# Altium PCB ModeloLevitadorMagneticoV1.0.PcbDoc
Units mm, origin at the board's own origin, x right, y up, seen from the top; angles counter-clockwise.
Board outline 200 x 150 mm, 2 copper layers (Top Layer, Bottom Layer); 203 components, 112 nets, 556 pads, 0 vias.
Unrouted connection lines stored in the file: 412.
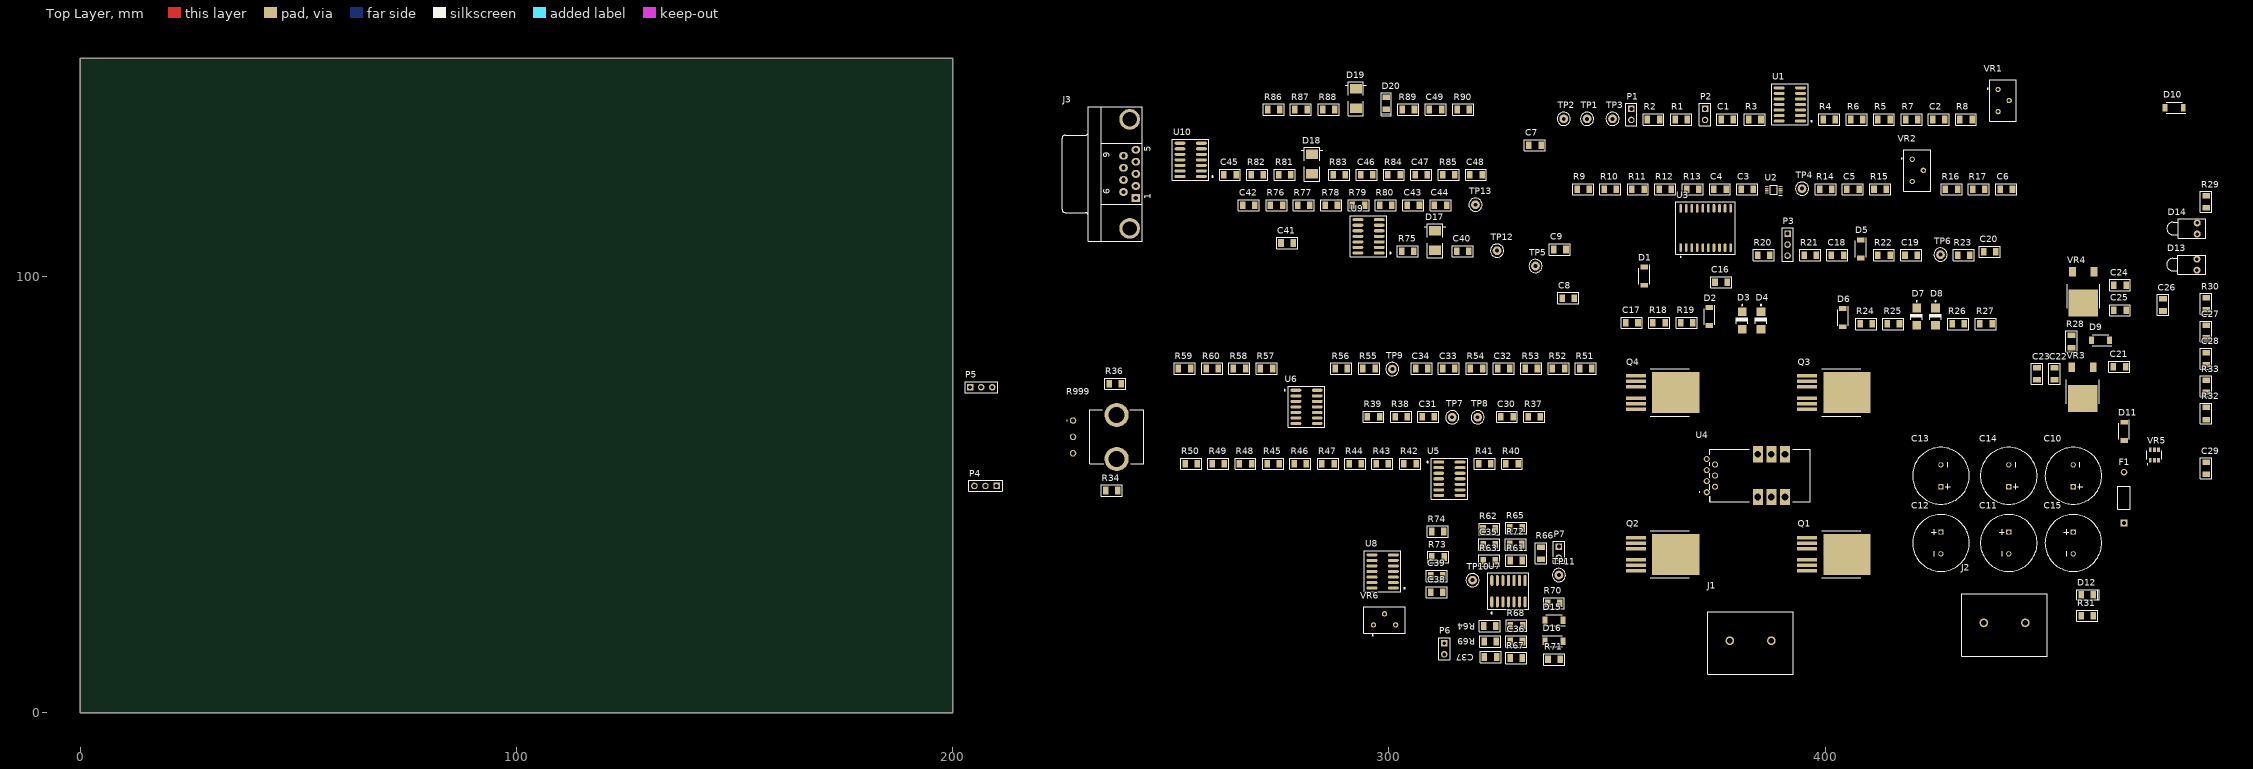
[diagram p0: Top Layer view]
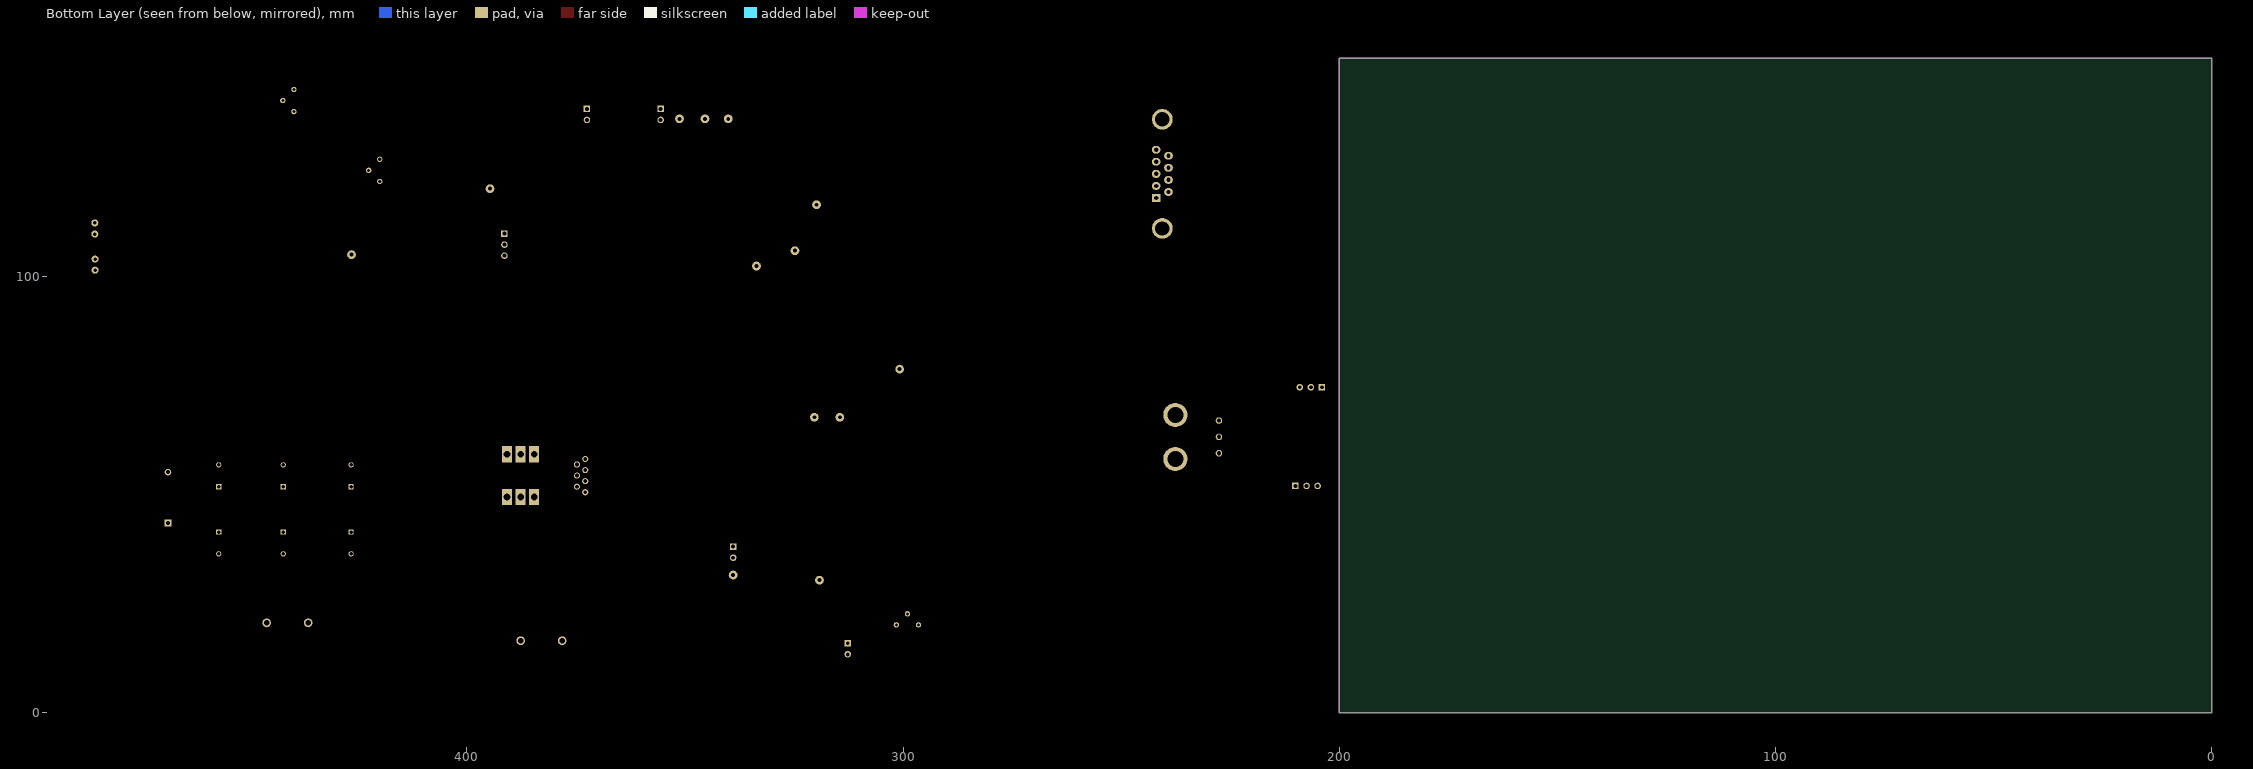
[diagram p1: Bottom Layer view, seen from below]

## Layer stack, top to bottom
Top Solder: solder mask 0.0102, Solder Resist, Dk 3.5
Top Layer: signal copper 0.0356
Dielectric 1: dielectric 0.32, FR-4, Dk 4.8
Bottom Layer: signal copper 0.0356
Bottom Solder: solder mask 0.0102, Solder Resist, Dk 3.5

## Board outline
0,0 200,0 200,150 0,150

## Design rules (kind name [scope] priority, off if disabled: settings)
AcuteAngle [All] p1: minimum=6.00000000000000E+0001 checktracksonly=TRUE
AssemblyTestPointUsage [(not InNetClass('NOTESTPOINTS'))] p1: allowmultiple=TRUE
AssemblyTestPointUsage AssemblyTestPointUsageN [InNetClass('NOTESTPOINTS')] p2: valid=2 allowmultiple=TRUE
AssemblyTestpoint [All] p1: testpointundercomponent=TRUE minsize=0.8 maxsize=2 preferedsize=1 minholesize=0 maxholesize=0.35 preferedholesize=0 testpointgrid=1.27 usegrid=FALSE gridoriginx=87.5 gridoriginy=62.5 gridtolerance=0 allowsidetop=TRUE minspacing=2.54 // Zollner
BoardOutlineClearance BoardCopperOutlineClearance [(OnLayer('Top Layer') OR OnLayer('Bottom Layer') )] p1: gap=0.5 ignorepadtopadclearanceinfootprint=FALSE except(1: Poly-OutlineEdge Region-OutlineEdge; 1.5: SMDPad-OutlineEdge THPad-OutlineEdge)
Clearance PadToViaClearance [IsVia and not IsComponentVia vs IsPad] p1: gap=0.025 ignorepadtopadclearanceinfootprint=TRUE
Clearance "Clearance (FAB)" [All] p2: gap=0.203 ignorepadtopadclearanceinfootprint=TRUE except(0.305: Arc-Poly Track-Poly SMDPad-Poly THPad-Poly Via-Poly Fill-Poly Poly-Poly)
ComponentClearance ComponentClearance_NetTie [((ObjectKind = 'Component') And (ComponentType = 'Net Tie')) Or (Footprint = 'StarPoint') Or (Footprint like 'NetTieVia*')] p1: gap=-3.81 collisioncheckmode=3 verticalgap=-3.81 showdistances=FALSE
ComponentClearance [All] p2: gap=0.254 collisioncheckmode=3 verticalgap=0.254 showdistances=FALSE
DiffPairsRouting [All] p1: maxlimit=1.27 minlimit=0.203 mostfreqgap=0.203 toplayer_minwidth=0.152 toplayer_maxwidth=2.54 toplayer_prefwidth=0.254 bottomlayer_minwidth=0.152 bottomlayer_maxwidth=2.54 bottomlayer_prefwidth=0.254 maxuncoupledlength=12.7
FabricationTestPointUsage [All] p1: valid=2 allowmultiple=FALSE
FabricationTestpoint [All] p1: side=3 testpointundercomponent=TRUE minsize=1.016 maxsize=2.54 preferedsize=1.524 minholesize=0 maxholesize=1.016 preferedholesize=0.813 testpointgrid=0.025 allowsidetop=TRUE allowsidebottom=TRUE usegrid=FALSE gridtolerance=0
HoleSize [All] p1: absolutevalues=TRUE maxlimit=6.35 minlimit=0.3 maxpercent=80.000 minpercent=20.000 // Zollner
HoleToHoleClearance HoleToHoleClearance_NetTieVia [InPadClass('NetTieVias') vs InPadClass('NetTieVias')] p1: gap=0 allowstackedmicrovias=TRUE
HoleToHoleClearance [All] p2: gap=0.25 allowstackedmicrovias=TRUE // Zollner
MinimumAnnularRing [All] p1: minimumring=0.15 // PCBWAY
MinimumSolderMaskSliver [All] p1: minsoldermaskwidth=0.2 // Zollner
PlaneClearance PlaneClearance_1 [All] p1: clearance=0.508
PlaneConnect [All] p1: pad.planeconnectstyle=Relief pad.reliefexpansion=0.508 pad.reliefentries=4 pad.reliefconductorwidth=0.254 pad.reliefairgap=0.254 via.planeconnectstyle=Direct via.reliefexpansion=0.508 via.reliefentries=4 via.reliefconductorwidth=0.254 via.reliefairgap=0.254
PolygonConnect [All] p1: thpad.connectstyle=Relief thpad.reliefconductorwidth=0.254 thpad.reliefentries=4 thpad.polygonreliefangle="90 Angle" thpad.airgapwidth=0.254 smdpad.connectstyle=Relief smdpad.reliefconductorwidth=0.254 smdpad.reliefentries=4 smdpad.polygonreliefangle="90 Angle" smdpad.airgapwidth=0.254 via.connectstyle=Direct via.reliefconductorwidth=0.254 via.reliefentries=4 via.polygonreliefangle="90 Angle" via.airgapwidth=0.254
RoutingVias [All] p1: holewidth=0.35 width=0.7 viastyle="Through Hole" minholewidth=0.3 minwidth=0.6 maxholewidth=1.27 maxwidth=1.27
SMDEntry [not IsTestpoint] p1: side=TRUE corner=TRUE anyangle=FALSE
SMDNeckDown [not IsTestpoint] p1: percent=90.000
SMDToCorner [All] p1: distance=10000
SMDToPlane [All] p1: distance=0
ShortCircuit [All vs not IsBoardCutoutRegion] p1: allowed=FALSE
SilkToSolderMaskClearance [IsPad] p1: minsilkscreentomaskgap=0.127 clearancetoexposedcopper=TRUE
SolderMaskExpansion [All] p1: expansion=0.05 istentingtop=FALSE // Zollner
SolderMaskExpansion SolderMaskExpansionToHoles [All] p2: expansion=0.1 istentingtop=FALSE soldermaskfromhole=TRUE // Zollner
UnRoutedNet [All] p1: checkbadconnections=TRUE
Width [All] p1: maxlimit=12.7 minlimit=0.203 preferedwidth=0.254
16 further rules are at their usual default settings.

## Classes and differential pairs
component class U_Signals2uC: C40 C41 C42 C43 C44 C45 C46 C47 C48 C49 D17 D18 D19 D20 J3 R75 R76 R77 R78 R79 R80 R81 R82 R83 R84 R85 R86 R87 R88 R89 R90 TP12 TP13 U9 U10
component class U_Fuentes: C21 C22 C23 C24 C25 C26 C27 C28 C29 D9 D10 D11 D12 D13 D14 F1 J2 R28 R29 R30 R31 R32 R33 VR3 VR4 VR5
component class U_Estimador: C35 C36 C37 C38 C39 D15 D16 P6 P7 R61 R62 R63 R64 R65 R66 R67 R68 R69 R70 R71 R72 R73 R74 TP10 TP11 U7 U8 VR6
component class "U_Controlador de corriente  V3": C1 C2 C3 C4 C5 C6 C7 C8 C9 C10 C11 C12 C13 C14 C15 C16 C17 C18 C19 C20 D1 D2 D3 D4 D5 D6 D7 D8 J1 P1 P2 P3 Q1 Q2 Q3 Q4 R1 R2 R3 R4 R5 R6 R7 R8 R9 R10 R11 R12 R13 R14 R15 R16 R17 R18 R19 R20 R21 R22 R23 R24 R25 R26 R27 TP1 TP2 TP3 TP4 TP5 TP6 U1 U2 U3 U4 VR1 VR2
component class U_Compensador: C30 C31 C32 C33 C34 R37 R38 R39 R40 R41 R42 R43 R44 R45 R46 R47 R48 R49 R50 R51 R52 R53 R54 R55 R56 R57 R58 R59 R60 TP7 TP8 TP9 U5 U6
component class Principal: P4 P5 R34 R36 R999

## Components (designator, comment, footprint, x,y, rotation, side; value= is the part's Value field where it differs from the comment)
C1 "Capacitor" C1206 377.557,135.966 r180 top
C2 "Capacitor" C1206 426.071,135.966 r180 top
C3 "Capacitor" C1206 382.129,119.964 r180 top
C4 "Capacitor" C1206 375.906,119.964 r180 top
C5 "Capacitor" C1206 406.386,119.964 r180 top
C6 "Capacitor" C1206 441.565,119.964 r180 top
C7 "Capacitor" C1206 333.485,130.04 r0 top
C8 "Capacitor" C1206 341.111,94.988 r0 top
C9 "Capacitor" C1206 339.203,106.164 r0 top
C10 "EKY-350ELL102MK25S" CAPPRD500W60D1300H2650 456.9,51.773 r90 top
C11 "EKY-350ELL102MK25S" CAPPRD500W60D1300H2650 442.1,41.373 r270 top
C12 "EKY-350ELL102MK25S" CAPPRD500W60D1300H2650 426.55,41.373 r270 top
C13 "EKY-350ELL102MK25S" CAPPRD500W60D1300H2650 426.55,51.773 r90 top
C14 "EKY-350ELL102MK25S" CAPPRD500W60D1300H2650 442.1,51.773 r90 top
C15 "EKY-350ELL102MK25S" CAPPRD500W60D1300H2650 456.9,41.373 r270 top
C16 "Capacitor" C1206 376.16,98.628 r180 top
C17 "Capacitor" C1206 355.713,89.357 r180 top
C18 "Capacitor" C1206 402.83,104.851 r180 top
C19 "Capacitor" C1206 419.721,104.851 r180 top
C20 "Capacitor" C1206 437.755,105.613 r180 top
C21 "Capacitor" C1206 467.475,79.273 r180 top
C22 "Capacitor" C1206 452.575,77.648 r90 top
C23 "Capacitor" C1206 448.6,77.673 r90 top
C24 "Capacitor" C1206 467.6,97.973 r180 top
C25 "Capacitor" C1206 467.6,92.223 r180 top
C26 "Capacitor" C1206 477.444,93.442 r90 top
C27 "Capacitor" C1206 487.35,87.346 r90 top
C28 "Capacitor" C1206 487.35,81.123 r90 top
C29 "Capacitor" C1206 487.35,55.977 r90 top
C30 "Capacitor" C1206 327.082,67.809 r0 top
C31 "Capacitor" C1206 309.048,67.809 r0 top
C32 "Capacitor" C1206 326.32,78.858 r0 top
C33 "Capacitor" C1206 313.747,78.858 r0 top
C34 "Capacitor" C1206 307.524,78.858 r0 top
C35 "Capacitor" C1206 323.03,38.489 r0 top
C36 "Capacitor" C1206 329.23,16.289 r0 top
C37 "Capacitor" C1206 323.305,12.739 r180 top
C38 "Capacitor" C1206 311,27.564 r180 top
C39 "Capacitor" C1206 311,31.314 r0 top
C40 "Capacitor" C1206 316.928,105.74 r180 top
C41 "Capacitor" C1206 276.669,107.645 r180 top
C42 "Capacitor" C1206 267.903,116.281 r180 top
C43 "Capacitor" C1206 305.622,116.281 r180 top
C44 "Capacitor" C1206 311.845,116.281 r180 top
C45 "Capacitor" C1206 263.585,123.266 r180 top
C46 "Capacitor" C1206 294.954,123.266 r180 top
C47 "Capacitor" C1206 307.4,123.266 r180 top
C48 "Capacitor" C1206 319.973,123.266 r180 top
C49 "Capacitor" C1206 310.702,138.252 r180 top
D1 "RSX205LAM30TR" SODFL4725X105N 358.507,100.025 r270 top
D2 "RSX205LAM30TR" SODFL4725X105N 373.493,90.754 r270 top
D3 "SMAJ15A" ONSC-SMA-2-403D-02_F_V 380.986,89.865 r270 top
D4 "SMAJ15A" ONSC-SMA-2-403D-02_F_V 385.304,89.865 r270 top
D5 "RSX205LAM30TR" SODFL4725X105N 408.164,106.248 r270 top
D6 "RSX205LAM30TR" SODFL4725X105N 404.1,90.5 r270 top
D7 "SMAJ15A" ONSC-SMA-2-403D-02_F_V 420.991,90.754 r270 top
D8 "SMAJ15A" ONSC-SMA-2-403D-02_F_V 425.309,90.754 r270 top
D9 "RSX205LAM30TR" SODFL4725X105N 463.125,85.298 r180 top
D10 "RSX205LAM30TR" SODFL4725X105N 480.027,138.651 r180 top
D11 "RSX205LAM30TR" SODFL4725X105N 468.525,64.473 r270 top
D12 "LED" "LED 1206 RED" 460.075,26.998 r0 top
D13 "LED" LED-1 485.25,102.669 r180 top
D14 "LED" LED-1 485.3,110.964 r180 top
D15 "RSX205LAM30TR" SODFL4725X105N 337.85,21.114 r180 top
D16 "RSX205LAM30TR" SODFL4725X105N 337.85,16.339 r0 top
D17 "Diodo Zener" SMB 310.578,105.994 r270 top
D18 "Diodo Zener" SMB 282.381,123.52 r270 top
D19 "Diodo Zener" SMB 292.414,138.506 r270 top
D20 "LED" "LED 1206 RED" 299.399,139.649 r270 top
F1 "Fuse" PIN-W2/E2.8 468.525,49.273 r90 top
J1 "Header 2" SMKDS5-2-9.5 382.928,16.459 r0 top
J2 "Header 2" SMKDS5-2-9.5 441.15,20.548 r0 top
J3 "DB9H" DB9H 242.004,117.944 r90 top
P1 "Header 2" HDR1X2 355.586,138.379 r270 top
P2 "Header 2" HDR1X2 372.477,138.379 r270 top
P3 "Header 3" HDR1X3 391.4,109.804 r270 top
P4 "Header 3" HDR1X3 210.065,51.939 r180 top
P5 "Header 3" HDR1X3 203.995,74.573 r0 top
P6 "Header 2" HDR1X2 312.7,15.889 r270 top
P7 "Header 2" HDR1X2 338.955,38.029 r270 top
Q1 "IPB160N04" TO263-7S 405.002,36.271 r270 top
Q2 "IPB160N04" TO263-7S 365.759,36.271 r270 top
Q3 "IPB160N04" TO263-7S 405.002,73.355 r270 top
Q4 "IPB160N04" TO263-7S 365.759,73.355 r270 top
R1 "3k2" R1206 367.016,135.966 r180 top
R2 "10k" R1206 360.666,135.966 r180 top
R3 "10k" R1206 383.907,135.966 r180 top
R4 "500" R1206 400.925,135.966 r180 top
R5 "4k7" R1206 413.498,135.966 r180 top
R6 "15k" R1206 407.275,135.966 r180 top
R7 "10k" R1206 419.848,135.966 r180 top
R8 "10k" R1206 432.294,135.966 r180 top
R9 "10k" R1206 344.537,119.964 r180 top
R10 "200k" R1206 350.76,119.964 r180 top
R11 "2k" R1206 357.11,119.964 r180 top
R12 "500" R1206 363.333,119.964 r180 top
R13 "1k" R1206 369.683,119.964 r180 top
R14 "1k" R1206 400.163,119.964 r180 top
R15 "1k" R1206 412.609,119.964 r180 top
R16 "1k" R1206 428.992,119.964 r180 top
R17 "1k" R1206 435.215,119.964 r180 top
R18 "4k7" R1206 361.936,89.357 r180 top
R19 "4k7" R1206 368.286,89.357 r180 top
R20 "230k" R1206 385.939,104.851 r180 top
R21 "230k" R1206 396.607,104.851 r180 top
R22 "100K" R1206 413.498,104.851 r180 top
R23 "10k" R1206 431.786,104.851 r180 top
R24 "4k7" R1206 409.434,89.103 r180 top
R25 "4k7" R1206 415.657,89.103 r180 top
R26 "0R" R1206 430.516,89.103 r180 top
R27 "1k" R1206 436.866,89.103 r180 top
R28 "0R" R1206 456.475,85.073 r270 top
R29 "0R" R1206 487.35,117.064 r90 top
R30 "4k7" R1206 487.35,93.696 r90 top
R31 "2.37K" R1206 460.1,22.198 r0 top
R32 "1k" R1206 487.35,68.55 r90 top
R33 "300" R1206 487.35,74.773 r90 top
R34 "374" R1206 236.475,50.879 r0 top
R36 "4k3" R1206 237.25,75.379 r180 top
R37 "1M" R1206 333.305,67.809 r0 top
R38 "1k" R1206 302.825,67.809 r0 top
R39 "1k" R1206 296.475,67.809 r0 top
R40 "1k" R1206 328.225,57.014 r0 top
R41 "1k" R1206 322.002,57.014 r0 top
R42 "1k" R1206 304.857,57.014 r0 top
R43 "1k" R1206 298.507,57.014 r0 top
R44 "1k" R1206 292.284,57.014 r0 top
R45 "1k" R1206 273.488,57.014 r0 top
R46 "1k" R1206 279.711,57.014 r0 top
R47 "1k" R1206 286.061,57.014 r0 top
R48 "1k" R1206 267.138,57.014 r0 top
R49 "100k" R1206 260.915,57.014 r0 top
R50 "100k" R1206 254.692,57.014 r0 top
R51 "221" R1206 345.116,78.858 r0 top
R52 "221" R1206 338.893,78.858 r0 top
R53 "4k3" R1206 332.67,78.858 r0 top
R54 "4k3" R1206 320.097,78.858 r0 top
R55 "800k" R1206 295.459,78.858 r0 top
R56 "100k" R1206 289.109,78.858 r0 top
R57 "100k" R1206 271.964,78.858 r0 top
R58 "1k" R1206 265.741,78.858 r0 top
R59 "1k" R1206 253.168,78.858 r0 top
R60 "800k" R1206 259.518,78.858 r0 top
R61 "3.56K" R1206 329.205,34.864 r180 top
R62 "100K" R1206 322.98,42.089 r180 top
R63 "100K" R1206 323.03,34.814 r0 top
R64 "10K" R1206 323.13,19.839 r180 top
R65 "3.56K" R1206 329.155,42.289 r0 top
R66 "100K" R1206 334.855,36.539 r270 top
R67 "10K" R1206 329.205,12.514 r0 top
R68 "10K" R1206 329.255,19.914 r180 top
R69 "10K" R1206 323.23,16.289 r0 top
R70 "1.8M" R1206 337.775,25.039 r0 top
R71 "1.8M" R1206 337.875,12.189 r0 top
R72 "3.56K" R1206 329.105,38.539 r180 top
R73 "100K" R1206 311.275,35.639 r0 top
R74 "10K" R1206 311.2,41.514 r180 top
R75 "10k" R1206 304.355,105.74 r180 top
R76 "10k" R1206 274.253,116.281 r180 top
R77 "10k" R1206 280.476,116.281 r180 top
R78 "12k" R1206 286.826,116.281 r180 top
R79 "1k" R1206 293.049,116.281 r180 top
R80 "10k" R1206 299.272,116.281 r180 top
R81 "1k" R1206 276.158,123.266 r180 top
R82 "10k" R1206 269.808,123.266 r180 top
R83 "10k" R1206 288.604,123.266 r180 top
R84 "1k" R1206 301.177,123.266 r180 top
R85 "10k" R1206 313.75,123.266 r180 top
R86 "10k" R1206 273.618,138.252 r180 top
R87 "10k" R1206 279.841,138.252 r180 top
R88 "10k" R1206 286.191,138.252 r180 top
R89 "10k" R1206 304.479,138.252 r180 top
R90 "2.37K" R1206 317.052,138.252 r180 top
R999 "Potenciometro" pote_5_pines_vertical 237.6,63.179 r270 top
TP1 "V_Hist" "TestPoint Keystone 5000 Silver-Red" 345.426,136.093 r180 top
TP2 "Vout_osc_HF" "TestPoint Keystone 5000 Silver-Red" 340.092,136.093 r180 top
TP3 "GND" "TestPoint Keystone 5000 Silver-Red" 351.268,136.093 r180 top
TP4 "Vi_Feed" "TestPoint Keystone 5000 Silver-Red" 394.702,120.091 r180 top
TP5 "BHB" "TestPoint Keystone 5000 Silver-Red" 333.615,102.354 r0 top
TP6 "AHB" "TestPoint Keystone 5000 Silver-Red" 426.452,104.978 r180 top
TP7 "Verror1" "TestPoint Keystone 5000 Silver-Red" 314.509,67.682 r0 top
TP8 "Verror2" "TestPoint Keystone 5000 Silver-Red" 320.351,67.682 r0 top
TP9 "Vcomp_A" "TestPoint Keystone 5000 Silver-Red" 300.793,78.731 r0 top
TP10 "Vpos_Est_A" "TestPoint Keystone 5000 Silver-Red" 319.18,30.339 r180 top
TP11 "Vder" "TestPoint Keystone 5000 Silver-Red" 338.98,31.514 r90 top
TP12 "Vcomp_D" "TestPoint Keystone 5000 Silver-Red" 324.802,105.867 r270 top
TP13 "Vpos_Est_D" "TestPoint Keystone 5000 Silver-Red" 319.846,116.408 r270 top
U1 "MCP664" SOIC14 391.908,140.03 r180 top
U2 "SN74LVC3G06DCUT" SOP50P310X90-8N 388.225,119.837 r180 top
U3 "HIP4081A" SOIC20 372.617,111.074 r90 top
U4 "HO_15-NP-0000" HO15NP0000 372.871,50.495 r0 top
U5 "MCP664" SOIC14 313.874,52.95 r0 top
U6 "MCP664" SOIC14 281.13,69.434 r0 top
U7 "MCP664" SOIC14 328.035,27.814 r90 top
U8 "MCP664" SOIC14 298.575,32.969 r180 top
U9 "MCP664" SOIC14 295.338,109.804 r180 top
U10 "MCP664" SOIC14 254.568,127.33 r180 top
VR1 "Trimmer (Thru-Hole)" 3299Y1203LF 439.66,142.824 r180 top
VR2 "Trimmer (Thru-Hole)" 3299Y1203LF 419.975,126.822 r180 top
VR3 "L78M12" TO252-AA 459.025,71.973 r180 top
VR4 "L78M05" TO252-AA 459.175,93.873 r180 top
VR5 "MAX6071" SOT23-6 475.475,59.039 r90 top
VR6 "Trimmer (Thru-Hole)" 3299Y1203LF 296.47,20.089 r270 top

## Footprints (in the part's own frame and the unit in brackets; to place one, negate y for a bottom-side part, rotate by r counter-clockwise, add the part's x,y. Pads: shape width x height; smd on the part's side, far side on the other; paste and mask are expansions set on the pad)
3299Y1203LF [mm]
  round 1.217 hole 0.71: 1(0,0) 2(-2.54,2.54) 3(0,5.08)
  silkscreen extent -4.19,-2.22 2.5,7.3, body extent -4.19,-2.22 1.91,7.3, height 11.65
C1206 [mm]
  rect 1.27x1.778 smd: 1(-1.4,0) 2(1.4,0)
  silkscreen extent -2.4,-1.3 2.4,1.3, body extent -1.6,-0.8 1.6,0.8, height 1
CAPPRD500W60D1300H2650 [mm]
  rect 1.2x1.2 hole 0.8: 1(0,0)
  round 1.2 hole 0.8: 2(5,0)
  silkscreen extent -4,-6.5 9,6.5, body extent -4,-6.5 9,6.5, height 26.5
DB9H [mm]
  rect 1.8x2 hole 1: 1(0,0)
  oval 1.8x2 hole 1: 2(2.77,0) 3(5.54,0) 4(8.31,0) 5(11.08,0) 6(1.385,2.84) 7(4.155,2.84) 8(6.925,2.84) 9(9.695,2.84)
  round 4.76 hole 3.26: 10(-6.955,1.42) 11(18.035,1.42)
  silkscreen extent -9.86,-1.48 20.94,16.92, body extent -9.84,-2.08 20.97,16.99, height 12.58
HDR1X2 [mm]
  rect 1.5x1.5 hole 0.9: 1(0,0)
  round 1.5 hole 0.9: 2(2.54,0)
  silkscreen extent -1.27,-1.27 3.81,1.27, body extent -1.27,-1.27 3.81,1.27, height 8.54
HDR1X3 [mm] "Connector; Header; 3 Position"
  rect 1.5x1.5 hole 0.9: 1(0,0)
  round 1.5 hole 0.9: 2(2.54,0) 3(5.08,0)
  silkscreen extent -1.27,-1.27 6.35,1.27, body extent -1.27,-1.27 6.35,1.27, height 8.54
HO15NP0000 [mm]
  round 1.4 hole 0.9: 1(0,0) 2(1.905,1.27) 3(0,2.54) 4(1.905,3.81) 5(0,5.08) 6(1.905,6.35) 7(0,7.62)
  rect 2.25x3.75 hole 1.5: 8(11.735,8.71) 9(14.835,8.71) 10(17.935,8.71) 11(17.935,-1.09) 12(14.835,-1.09) 13(11.735,-1.09)
  silkscreen extent -1.75,-2.19 23.75,9.81, body extent -0.18,-2.21 23.75,9.79, height 11.9
"LED 1206 RED" [mm] "Led SMD 1206"
  rect 1.27x1.778 smd: 1(-1.4,0) 2(1.4,0)
  silkscreen extent -2.41,-1.2 2.79,1.2, body extent -1.66,-0.78 1.75,0.81, height 0.5
LED-1 [mm] "LED; 2 Leads"
  round 1.6 hole 0.8: 1(0,1.27) 2(0,-1.27)
  silkscreen extent -2,-2.2 6.95,2.2
ONSC-SMA-2-403D-02_F_V [mm] "Molded, 2-Leads, Body 4.32x2.6mm"
  rect 2x2 smd: 1(-2,0) 2(2,0)
  silkscreen extent -3.67,-1.3 0.74,1.3, body extent -2.16,-1.3 2.16,1.3, height 2.2
PIN-W2/E2.8 [mm] "Thru-Hole; 2 Leads"
  rect 1.5x1.5 hole 0.9: 1(-5.825,0)
  round 1.5 hole 0.9: 2(5.825,0)
  silkscreen extent -2.65,-1.4 2.65,1.4
pote_5_pines_vertical [mm]
  round 1.5 hole 1: 1(-3.75,-10) 2(0,-10) 3(3.75,-10)
  round 5.52 hole 3.68: GND(-5.05,0) GND(5.05,0)
  silkscreen extent -6.2,-11.4 6.2,6.2, body extent -6.79,-10.4 6.79,6.2, height 25.1
R1206 [mm]
  rect 1.27x1.778 smd: 1(-1.4,0) 2(1.4,0)
  silkscreen extent -2.4,-1.3 2.4,1.3, body extent -1.6,-0.8 1.6,0.8, height 1
SMB [mil] "Para diodos como  4007, supresores, etc"
  rect 85x108 smd: 1(0,0) 2(-175,0)
  silkscreen extent -240,-95 68,95, body extent -194,-55 14,55, height 92
SMKDS5-2-9.5 [mm] "Phoenix Contact; Terminal block; 2way; 32A max; 9.52mm pitch; 135°"
  round 2 hole 1.3: 1(-4.76,0) 2(4.76,0)
  silkscreen extent -9.8,-7.65 9.73,6.65, body extent -10.08,-7.5 9.53,11, height 21.5
SODFL4725X105N [mm]
  rect 1.12x1.72 smd: 1(-2.075,0) 2(2.075,0)
  silkscreen extent -2.64,-1.25 1.85,1.25, body extent -2.35,-1.25 2.35,1.25, height 1.05
SOIC14 [mm]
  oval 2.5x0.7 smd: 1(-2.45,4.445) 2(-2.45,3.175) 3(-2.45,1.905) 4(-2.45,0.635) 5(-2.45,-0.635) 6(-2.45,-1.905) 7(-2.45,-3.175) 8(2.45,-3.175) 9(2.45,-1.905) 10(2.45,-0.635) 11(2.45,0.635) 12(2.45,1.905) 13(2.45,3.175) 14(2.45,4.445)
  silkscreen extent -5.16,-4.06 4.19,5.33, body extent -3.12,-3.68 3.07,4.95, height 1.7
SOIC20 [mm]
  oval 2x0.6 smd: 1(-4.5,5.715) 2(-4.5,4.445) 3(-4.5,3.175) 4(-4.5,1.905) 5(-4.5,0.635) 6(-4.5,-0.635) 7(-4.5,-1.905) 8(-4.5,-3.175) 9(-4.5,-4.445) 10(-4.5,-5.715) 11(4.5,-5.715) 12(4.5,-4.445) 13(4.5,-3.175) 14(4.5,-1.905) 15(4.5,-0.635) 16(4.5,0.635) 17(4.5,1.905) 18(4.5,3.175) 19(4.5,4.445) 20(4.5,5.715)
  silkscreen extent -6.68,-6.73 5.97,6.86, body extent -5.31,-6.5 5.31,6.5, height 2.66
SOP50P310X90-8N [mm]
  rect 0.85x0.3 smd: 1(-1.575,0.75) 2(-1.575,0.25) 3(-1.575,-0.25) 4(-1.575,-0.75) 5(1.575,-0.75) 6(1.575,-0.25) 7(1.575,0.25) 8(1.575,0.75)
  silkscreen extent -2,-1 0.8,1.25, body extent -1.55,-1 1.55,1, height 0.77
SOT23-6 [mm]
  rect 1.1x0.65 smd: 1(-1.2,0.95) 2(-1.2,0) 3(-1.2,-0.95) 4(1.2,-0.95) 5(1.2,0) 6(1.2,0.95)
  silkscreen extent -2.19,-1.75 1,1.75, body extent -1.5,-1.5 1.5,1.5, height 1.39
"TestPoint Keystone 5000 Silver-Red" [mm]
  round 2 hole 0.9: 1(0,0)
  silkscreen extent -1.52,-1.52 1.51,1.52, body extent -1.27,-1.27 1.27,1.27, height 4.89
TO252-AA [mil]
  rect 60x89 smd: 1(-97,-282) 3(97,-282)
  rect 265x245 smd: 4(0,0)
  silkscreen extent -149,-169 149,48, body extent -133,-291 133,107, height 156
TO263-7S [mm]
  rect 0.8x4.6 smd: 1(-3.81,-9.15) 2(-2.54,-9.15) 3(-1.27,-9.15) 5(1.27,-9.15) 6(2.54,-9.15) 7(3.81,-9.15)
  rect 9.4x10.8 smd: 4(0,0)
  silkscreen extent -5.41,-5.79 5.41,3.15, body extent -5.03,-10.97 4.97,4.7, height 4.78

## Part data
C10 C11 C12 C13 C14 C15: "Capacitor Polarised"
D1 D2 D5 D6 D9 D10 D11 D15 D16: "Schottky Diode"
D3 D4 D7 D8: library part 1SMA60CAT3G, "400 W Peak Power Zener Transient Voltage Suppressor, 2-Pin SMA, Pb-Free, Tape and Reel"
D12 D13 D14 D20: "Typical RED GaAs LED"
D17 D18 D19: "SZ1SMB5915BT3G"
J1 J2 P1 P2 P6 P7: "Header, 2-Pin"
P3 P4 P5: "Header, 3-Pin"
Q1 Q2 Q3 Q4: "HEXFET N-Channel Power MOSFET"
R1 R2 R3 R4 R5 R6 R7 R8 R9 R10 R11 R12 R13 R14 R15 R16 R17 R18 R19 R20 R21 R22 R23 R24 R25 R26 R27 R28 R29 R30 R31 R32 R33 R34 R36 R37 R38 R39 R40 R41 R42 R43 R44 R45 R46 R47 R48 R49 R50 R51 R52 R53 R54 R55 R56 R57 R58 R59 R60 R61 R62 R63 R64 R65 R66 R67 R68 R69 R70 R71 R72 R73 R74 R75 R76 R77 R78 R79 R80 R81 R82 R83 R84 R85 R86 R87 R88 R89 R90: library part R1206, "Resistor Chip; 1/8W;"
R999: "Vertical - 5 pines"
TP1 TP2 TP3 TP4 TP5 TP6 TP7 TP8 TP9 TP10 TP11 TP12 TP13: library part Testpoint
U2: "Schmitt-Trigger Inverter"
U3: "INTERSIL, 80V, 2.5A peak, High Frequency Full Bridge FET Driver"
U4: "Integrated Circuit"
VR1 VR2 VR6: library part Trimmer, "Res Cermet Trimmer 500K Ohm 10% 0.5W 25(Elec)Turn 2.19mm (9.53 X 4.83 X 11.55mm) Pin Thru-Hole Tube"
VR3 VR4: library part "Volt Reg", "Voltage Regulator"
VR5: library part MAX6070

## Nets (pads, with @x,y where several pads share a name; then routed paths per layer and width w, separated by ;. In a path a pad name is that pad's centre, name@x,y a point inside that pad or via, vN(x,y) a via of type N, cw(c..) or ccw(c..) an arc to the next point about the centre after c; other vN are vias at no path point)
+2.5V: C27.2 J3.2 R11.1 R15.1 R38.2 R39.2 R44.1 R55.2 R73.1 R81.2 R87.1 U6.3 U6.5 U7.10 U8.3 VR2.3 VR5.5 VR5.6
+2.6V: C3.2 C4.2 C17.1 R1.2 U4.4 VR1.2
+5.0V: C20.2 R22.2 R26.2 R71.1 U4.1
+5V: C5.2 C26.2 C28.2 C31.1 C32.2 C43.1 D10.2 D14.1 R29.2 R34.2 U1.4 U2.8 U5.4 U6.4 U7.4 U8.4 U9.4 U10.4 VR1.1 VR4.3
+12V: C7.2 C8.2 C9.2 C18.2 C22.2 C23.2 D1.2 D2.2 D5.1 D9.2 D13.1 P3.3 R28.2 U3.15 U3.16 VR3.3
+24V: C10.1 C11.1 C12.1 C13.1 C14.1 C15.1 D12.1 F1.1 J2.1 Q1.4 Q2.4
AHB: C19.2 D2.1 TP6.1 U3.10
AHO: D4.1 Q2.1 R18.1 U3.11
AHS: C19.1 D4.2 J1.2 Q2.2 Q2.3 Q2.5 Q2.6 Q2.7 Q4.4 R18.2 U3.12
AHS2: J1.1 U4.8 U4.9 U4.10
ALO: D7.1 Q4.1 R24.1 U3.13
BHB: C6.2 D1.1 TP5.1 U3.1
BHI/ALI: U2.3 U2.7 U3.2 U3.6
BHO: D3.1 Q1.1 R19.2 U3.20
BHS: C6.1 U3.19
BLI/AHI: P2.2 U2.1
BLO: D8.1 Q3.1 R25.2 U3.18
D\I\S\A\B\L\E\: C18.1 D5.2 D6.1 P3.2 R23.2 U3.3
GND: C1.2 C2.2 C3.1 C4.1 C7.1 C8.1 C9.1 C10.2 C11.2 C12.2 C13.2 C14.2 C15.2 C16.1 C17.2 C20.1 C21.1 C22.1 C23.1 C24.1 C25.1 C26.1 C27.1 C28.1 C29.1 C31.2 C32.1 C33.2 C34.1 C38.2 C39.1 C40.1 C43.2 C47.1 C49.2 D6.2 D7.2 D8.2 D17.1 D18.1 D19.1 J2.2 J3.3 J3.7 J3.10 J3.11 Q3.2 Q3.3 Q3.5 Q3.6 Q3.7 Q4.2 Q4.3 Q4.5 Q4.6 Q4.7 R5.1 R13.1 R17.1 R20.2 R21.2 R23.1 R24.2 R25.1 R27.1 R31.1 R32.2 R33.1 R36.1 R48.1 R59.1 R70.1 R76.1 R82.1 R89.1 R90.1 TP3.1 U1.11 U2.4 U3.4 U3.14 U3.17 U4.2 U4.7 U5.11 U6.11 U7.11 U8.11 U9.11 U10.11 VR5.2
HDEL: R20.1 U3.8
LDEL: R21.1 U3.9
NetC2_1: C2.1 R2.1 R6.2 U1.9
NetC21_2: C21.2 D9.1 D11.1 VR3.1
NetC24_2: C24.2 C25.2 D10.1 R28.1 VR4.1
NetC29_2: C29.2 VR5.1
NetC30_2: C30.2 R37.1 R42.2 U5.2
NetC33_1: C33.1 R51.1
NetC34_2: C34.2 R52.1
NetC35_2: C35.2 R62.2 R63.2 U7.13
NetC36_1: C36.1 P6.2 U7.5 U7.7
NetC36_2: C36.2 R67.2 R68.1
NetC37_1: C37.1 P6.1
NetC37_2: C37.2 R69.1
NetC38_1: C38.1 R68.2 U7.6
NetC39_2: C39.2 R66.2 R73.2 U7.12
NetC41_2: C41.2 R76.2 R77.1 U10.6
NetC42_2: C42.2 R78.1 R79.2 U10.2
NetC44_1: C44.1 R79.1
NetC45_2: C45.2 R82.2 R83.1 U10.9
NetC46_2: C46.2 R84.1
NetC47_2: C47.2 R81.1 R84.2 U10.3
NetC48_2: C48.2 R86.1 R87.2 U10.13
NetC49_1: C49.1 R88.2 R89.2 U10.12
NetD3_2: D3.2 Q1.2 Q1.3 Q1.5 Q1.6 Q1.7 Q3.4 R19.1 U4.11 U4.12 U4.13
NetD11_2: D11.2 F1.2
NetD12_2: D12.2 R31.2
NetD13_2: D13.2 R32.1
NetD14_2: D14.2 R33.2
NetD15_1: D15.1 R65.2 R66.1 R70.2
NetD15_2: D15.2 D16.1 U7.8
NetD20_2: D20.2 R90.2
NetP7_1: P7.1 R72.1
NetR1_1: R1.1 R3.2 R5.2 U1.6
NetR4_2: R4.2 U1.2
NetR7_1: R7.1 R8.2 U1.5
NetR9_1: R9.1 R11.2 U1.10
NetR10_1: R10.1 R12.2 U1.3
NetR12_1: R12.1 VR2.1 VR2.2
NetR13_2: R13.2 VR1.3
NetR14_1: R14.1 R15.2 U1.13
NetR16_2: R16.2 R17.2 U1.12
NetR22_1: R22.1 U4.5
NetR29_1: R29.1 R30.2 VR5.4
NetR30_1: R30.1 VR5.3
NetR34_1: R34.1 R999.1
NetR38_1: R38.1 R40.2 U5.13
NetR39_1: R39.1 R41.2 U5.6
NetR43_2: R43.2 R47.1 U5.12
NetR44_2: R44.2 R48.2 U5.3
NetR45_1: R45.1 U5.8 U5.10
NetR45_2: R45.2 R46.1 U5.5
NetR49_1: R49.1 R57.2 U6.2
NetR49_2: R49.2 R52.2 R54.2
NetR50_1: R50.1 R56.2 U6.6
NetR50_2: R50.2 R51.2 R53.2
NetR53_1: R53.1 R57.1 U6.7
NetR54_1: R54.1 R58.1 U6.1
NetR55_1: R55.1 R58.2 U6.9
NetR59_2: R59.2 R60.1 U6.10
NetR61_1: R61.1 R65.1 R72.2 U7.9
NetR64_1: R64.1 R69.2 U7.2
NetR74_2: R74.2 U8.2 VR6.1
NetR75_1: R75.1 U9.6 U9.7
NetR80_2: R80.2 U10.5
NetR85_2: R85.2 U10.10
NetU2_5: U2.5 U3.5 U3.7
PRESENCIA_PLACA: D20.1 J3.8
STANDBY: R26.1 R27.2
V_HALL: C16.2 R16.1 R74.1 U4.3
V_HIST: P1.1 R10.2 TP1.1 U1.1
V_I*R: U7.3 U8.1 VR6.2 VR6.3
VCOMP_A: P4.1 R60.2 TP9.1 U6.8
VCOMP_D: C41.1 P4.3 R77.2 TP12.1 U10.7
VCOMP_DAC: J3.1 R80.1
VDER: P7.2 R64.2 TP11.1 U7.1
VERROR1: R42.1 R46.2 TP7.1 U5.7
VERROR2: R47.2 R56.1 TP8.1 U5.14
"VI_ ERROR": R4.1 R7.2 U1.7
VI_FEED: C46.1 R8.1 R14.2 R67.1 TP4.1 U1.14 U9.5
VI_FEED_ADC: C42.1 D18.2 J3.5 R78.2 U10.1
VI_FEED_VALOR_MEDIO_ADC: C40.2 D17.2 J3.4 R75.2
VI_REF: P4.2 R3.1
VIN_OSC_HF: P1.2 R6.1
VINTEGRADOR: C30.1 R37.2 R43.1 U5.1
VOUT_OSC_HF: P2.1 R2.2 R9.2 TP2.1 U1.8
VPOS_EST: P5.2 R40.1 R41.1
VPOS_EST_A: C35.1 P5.1 R63.1 TP10.1 U7.14
VPOS_EST_D: C45.1 P5.3 R83.2 TP13.1 U10.8
VPOS_EST_DAC: J3.6 R85.1
VPOS_REF: R36.2 R88.1 R999.2 R999.3 U5.9
VPOS_REF_ADC: C48.1 D19.2 J3.9 R86.2 U10.14
VPST: D16.2 R61.2 R62.1 R71.2
pads on no net: C1.1 C5.1 C44.2 P3.1 R999.GND U2.2 U2.6 U4.6 U6.12 U6.13 U6.14 U8.5 U8.6 U8.7 U8.8 U8.9 U8.10 U8.12 U8.13 U8.14 U9.1 U9.2 U9.3 U9.8 U9.9 U9.10 U9.12 U9.13 U9.14 VR3.4 VR4.4

## Keep-outs
Keep-Out Layer:
  the board outline again, w0.254

## Text inside footprints (layer, text, board x,y; h text height)
J3: Top Overlay "6" at 236.059,118.829 h1.5 r90; Top Overlay "9" at 236.059,127.139 h1.5 r90; Top Overlay "5" at 245.459,128.524 h1.5 r90; Top Overlay "1" at 245.459,117.694 h1.5 r90; Mechanical 29 "1" at 245.459,117.694 h1.5 r90; Mechanical 29 "5" at 245.459,128.524 h1.5 r90; Mechanical 29 "9" at 236.059,127.139 h1.5 r90; Mechanical 29 "6" at 236.059,118.829 h1.5 r90